# EAGLE board RasPi-P1-HAT-B_v37 (EAGLE 9.7.0)
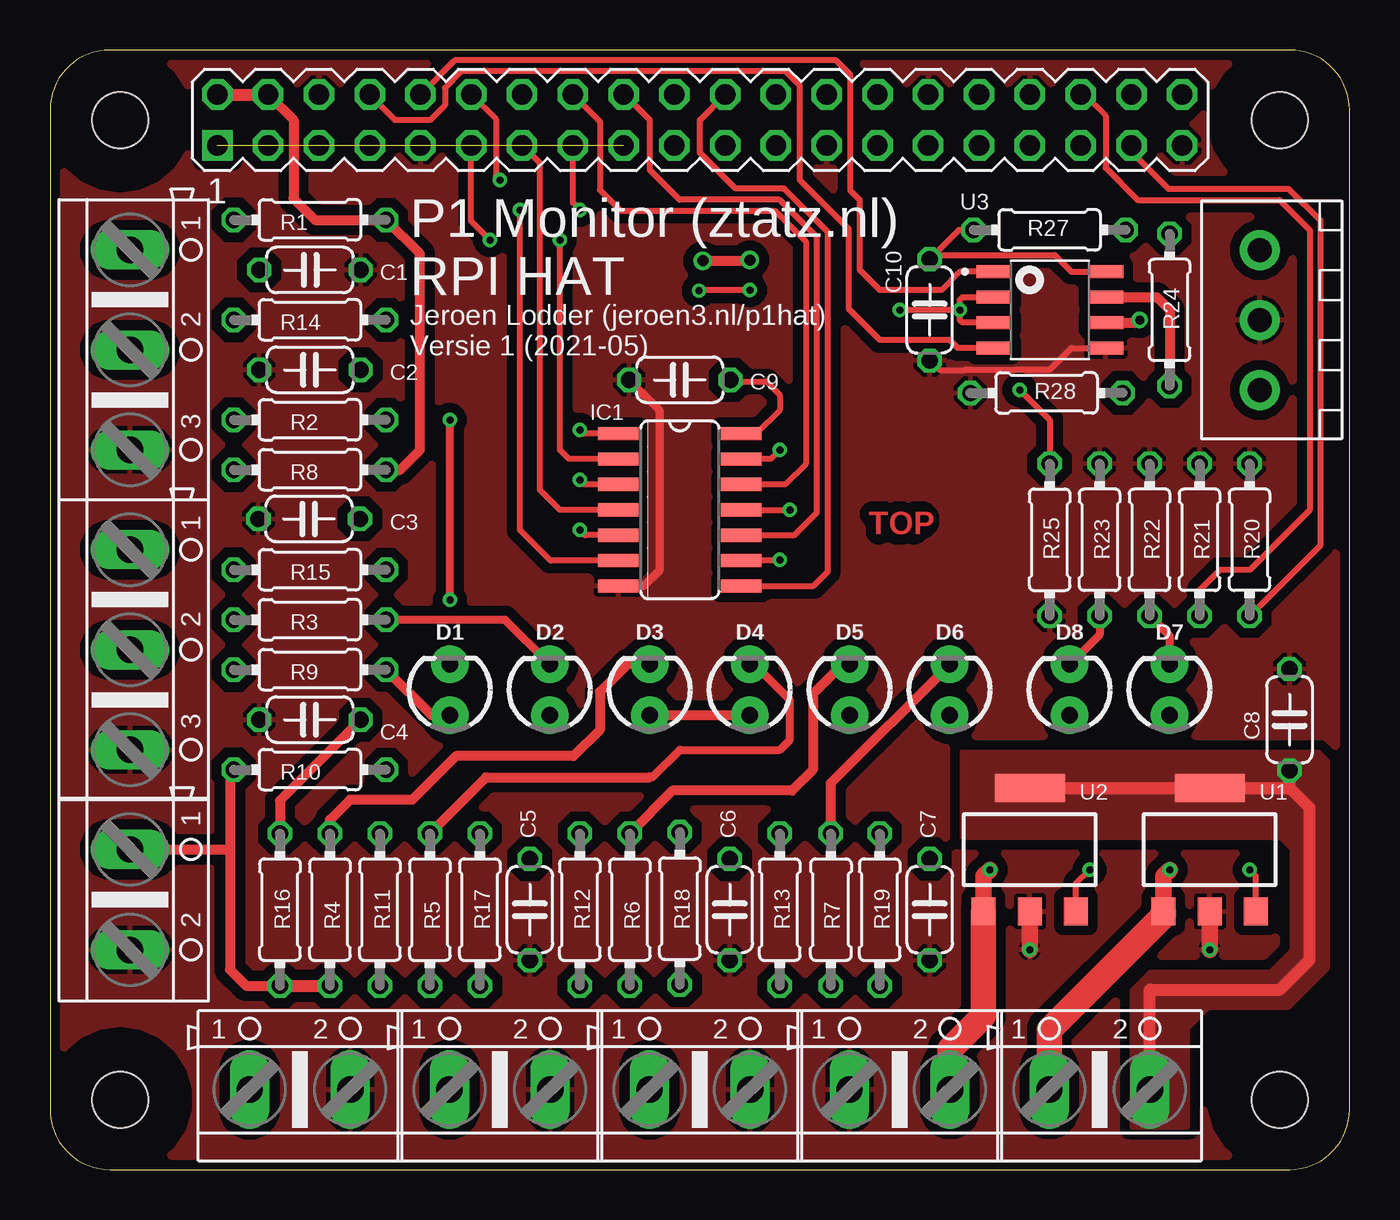
[diagram p0: board, top side]
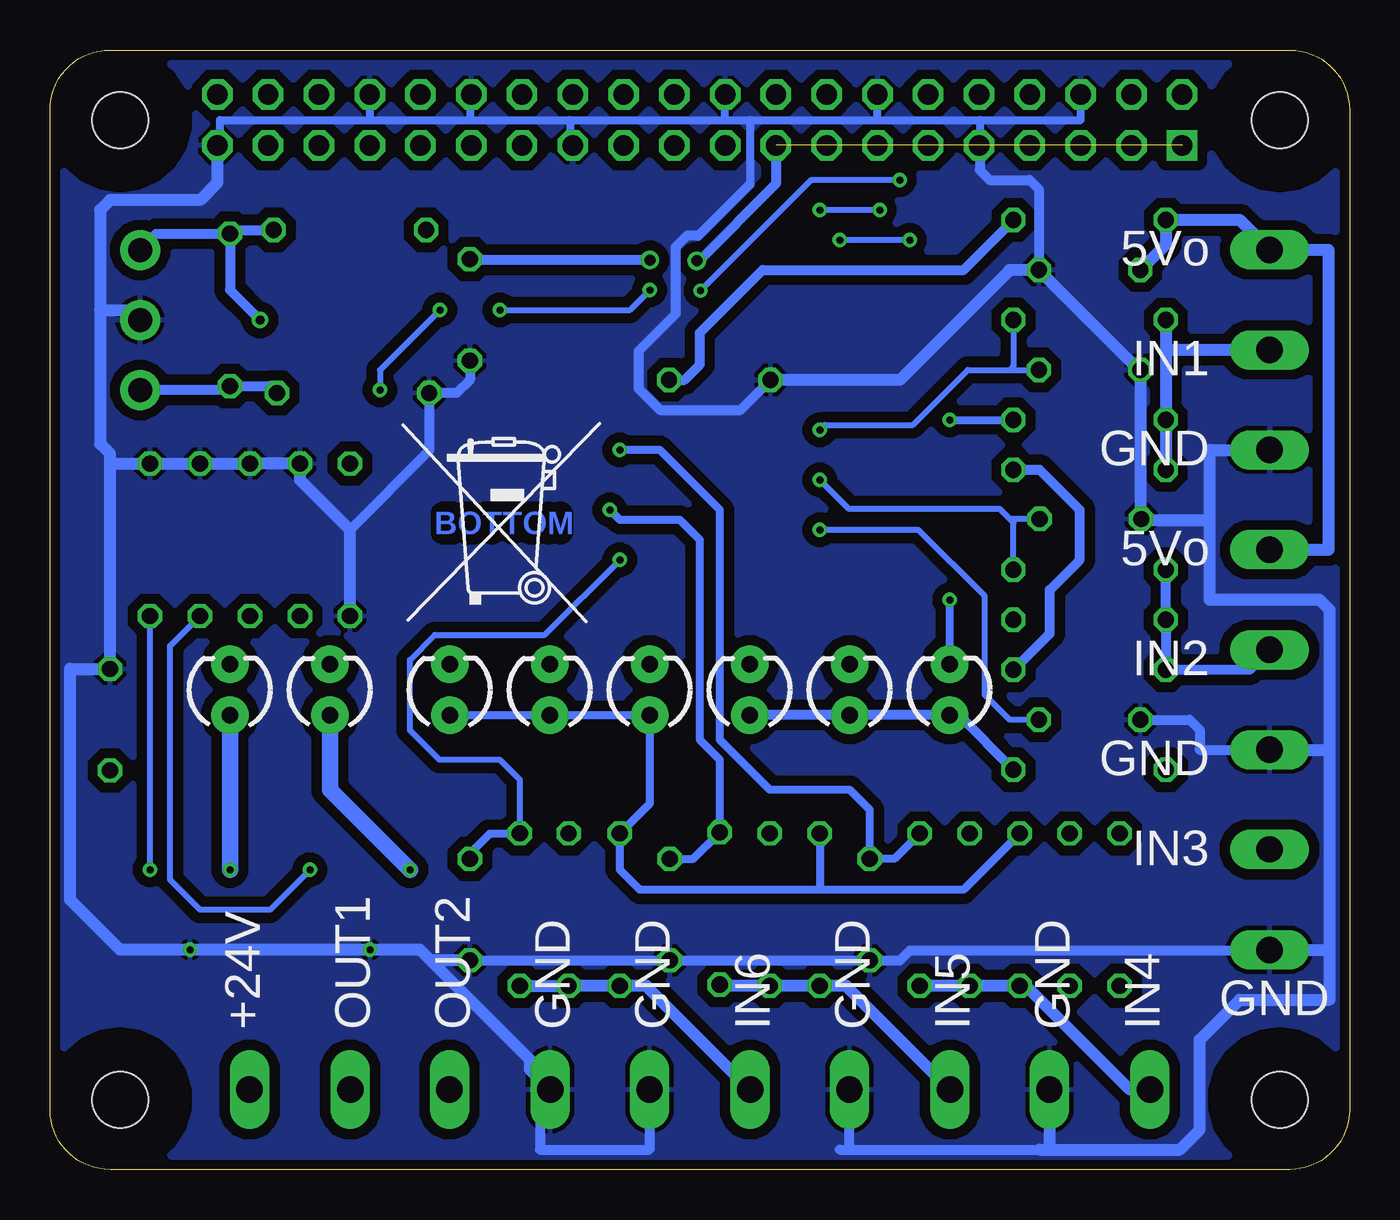
[diagram p1: board, bottom side, seen from below]

Size 65 x 56 mm. Coordinates in mm from the lower left corner, seen from the top.
Outline: 0,3 arc90 3,0 62,0 arc90 65,3 65,53 arc90 62,56 3,56 arc90 0,53 0,3
Copper layers (1*16): Top 0.018mm / dielectric 1.55mm / Bottom 0.018mm
Design rules "eC_2Layer_PClass6_BaseCopperO18_eCDefault_EMRI": minimum track width 0.151mm, minimum drill 0.3mm, track to track 0.15mm, track to pad 0.15mm, pad to pad 0.15mm, via to via 0.15mm, smd to smd 0mil, copper to edge 0.25mm, drill to drill 0.35mm, minimum pad ring 0.175mm, minimum via ring 0.18mm, stop-mask expansion 0mil, vias tented up to drill 0.45mm, thermal gap 0.2mm
Net classes: 0 default: width 0.3 mm, clearance 0.25 mm; 1 normal: width 0.3 mm, clearance 0.25 mm; 2 power: width 0.5 mm, clearance 0.25 mm
Holes 2.8 mm at 3.5,3.5 3.5,52.5 61.5,52.5 61.5,3.5
tRestrict: area 1.9,51 to 5,54; area 60,51 to 63,54; area 60,1.9 to 63,5; area 1.9,1.9 to 5,5
bRestrict: area 1.9,1.9 to 5,5; area 1.9,51 to 5,54; area 60,1.9 to 63,5; area 60,51 to 63,54

## Footprints (pad centres in the part's own frame; a part is rotated, then mirrored left to right if it is on the bottom)
C050-024X044 = drill 0.813 octagon: 1 -2.54,0; 2 2.54,0
LED_3MM = drill 0.813 pad 1.88: A -1.27,0; K 1.27,0
SO14 = smd 0.66 x 2.032: 1 -3.81,-3.073; 2 -2.54,-3.073; 3 -1.27,-3.073; 4 0,-3.073; 5 1.27,-3.073; 6 2.54,-3.073; 7 3.81,-3.073; 8 3.81,3.073; 9 2.54,3.073; 10 1.27,3.073; 11 0,3.073; 12 -1.27,3.073; 13 -2.54,3.073; 14 -3.81,3.073
PIN_20X2 = drill 1.016 square: 1 -24.13,-1.27 | drill 1.016 octagon: 2 -24.13,1.27; 3 -21.59,-1.27; 4 -21.59,1.27; 5 -19.05,-1.27; 6 -19.05,1.27; 7 -16.51,-1.27; 8 -16.51,1.27; 9 -13.97,-1.27; 10 -13.97,1.27; 11 -11.43,-1.27; 12 -11.43,1.27; 13 -8.89,-1.27; 14 -8.89,1.27; 15 -6.35,-1.27; 16 -6.35,1.27; 17 -3.81,-1.27; 18 -3.81,1.27; 19 -1.27,-1.27; 20 -1.27,1.27; 21 1.27,-1.27; 22 1.27,1.27; 23 3.81,-1.27; 24 3.81,1.27; 25 6.35,-1.27; 26 6.35,1.27; 27 8.89,-1.27; 28 8.89,1.27; 29 11.43,-1.27; 30 11.43,1.27; 31 13.97,-1.27; 32 13.97,1.27; 33 16.51,-1.27; 34 16.51,1.27; 35 19.05,-1.27; 36 19.05,1.27; 37 21.59,-1.27; 38 21.59,1.27; 39 24.13,-1.27; 40 24.13,1.27
0204/7 = drill 0.813 octagon: 1 -3.81,0; 2 3.81,0
PG-SOT-223 = smd 1.2 x 1.4: 1 -2.311,-3.099; 2 0,-3.099; 3 2.311,-3.099 | smd 3.5 x 1.4: 4 0,3.099
SOIC-8 = smd 1.75 x 0.65: 1 -2.8,1.905; 2 -2.8,0.635; 3 -2.8,-0.635; 4 -2.8,-1.905; 5 2.8,-1.905; 6 2.8,-0.635; 7 2.8,0.635; 8 2.8,1.905
AK500/3 = drill 1.321 long: 1 -5.004,0; 2 0,0; 3 5.004,0
AK500/2 = drill 1.321 long: 1 -2.515,0; 2 2.515,0
STL1550/3G-3.5-V- = drill 1.2 pad 2: P$1 0,0; P$2 3.5,0; P$3 7,0

## Placement (x,y rotation side)
C1  100nF  [C050-024X044]  13,45 0 top
C2  1nF  [C050-024X044]  13,40 180 top
C3  1nF  [C050-024X044]  12.96,32.54 180 top
C4  1nF  [C050-024X044]  13,22.5 180 top
C5  1nF  [C050-024X044]  24,13 270 top
C6  1nF  [C050-024X044]  34,13 270 top
C7  1nF  [C050-024X044]  44,13 270 top
C8  100nF  [C050-024X044]  62,22.5 90 top
C9  1nF  [C050-024X044]  31.5,39.5 180 top
C10  100nF  [C050-024X044]  44,43 270 top
D1  [LED_3MM]  20,24 90 top
D2  [LED_3MM]  25,24 90 top
D3  [LED_3MM]  30,24 90 top
D4  [LED_3MM]  35,24 90 top
D5  [LED_3MM]  40,24 90 top
D6  [LED_3MM]  45,24 90 top
D7  [LED_3MM]  56,24 90 top
D8  [LED_3MM]  51,24 90 top
IC1  74HC14D  [SO14]  31.5,33 270 top
K1  SSW-120-23-G-D  [PIN_20X2]  32.5,52.5 0 top
R1  10  [0204/7]  13,47.5 180 top
R2  1k  [0204/7]  13,37.5 180 top
R3  1k  [0204/7]  13,27.5 180 top
R4  1k  [0204/7]  14,13 270 top
R5  1k  [0204/7]  19,13 270 top
R6  1k  [0204/7]  29,13 270 top
R7  1k  [0204/7]  39.06,13 270 top
R8  1k  [0204/7]  13,35 180 top
R9  1k  [0204/7]  13,25 180 top
R10  1k  [0204/7]  13,20 180 top
R11  1k  [0204/7]  16.5,13 270 top
R12  1k  [0204/7]  26.5,13 270 top
R13  1k  [0204/7]  36.5,13 270 top
R14  1k  [0204/7]  13,42.5 180 top
R15  1k  [0204/7]  13,30 180 top
R16  1k  [0204/7]  11.5,13 270 top
R17  1k  [0204/7]  21.5,13 270 top
R18  1k  [0204/7]  31.5,13.06 270 top
R19  1k  [0204/7]  41.5,13 270 top
R20  3k9  [0204/7]  60,31.5 90 top
R21  3k9  [0204/7]  57.5,31.5 90 top
R22  3k9  [0204/7]  55,31.5 90 top
R23  3k9  [0204/7]  52.5,31.5 90 top
R24  Rt  [0204/7]  56,43 90 top
R25  3k9  [0204/7]  50,31.5 270 top
R27  1k  [0204/7]  50,47 180 top
R28  1k  [0204/7]  49.84,38.84 180 top
U1  BTS4141N  [PG-SOT-223]  58,16 0 top
U2  BTS4141N  [PG-SOT-223]  49,16 0 top
U3  ST3485EBDR  [SOIC-8]  50,43 0 top
U$3  [MUELLTONNE_10.00]  48,27 0 bottom
X1  AK500/3  [AK500/3]  4,41 270 top
X2  AK500/3  [AK500/3]  4,26 270 top
X3  AK500/2  [AK500/2]  4,13.5 270 top
X4  AK500/2  [AK500/2]  12.5,4 0 top
X5  AK500/2  [AK500/2]  22.5,4 0 top
X6  AK500/2  [AK500/2]  32.5,4 0 top
X7  AK500/2  [AK500/2]  52.5,4 0 top
X8  AK500/2  [AK500/2]  42.5,4 0 top
X9  STL1550/3G-3.5-V-GREEN  [STL1550/3G-3.5-V-]  60.5,39 90 top

## Library data of the parts
C1-C10 = Library; DIELECTRIC: X7R; SPICEPREFIX: C
D1-D8 = Library; PROD_ID: DIO-08794
IC1 = 74xx-eu
K1 U1-U3 X9 = Library
R1-R25 R27 R28 = rcl; SPICEPREFIX: R; TOLERANCE: 5%
U$3 = logo
X1-X8 = Library; OC_FARNELL: unknown; OC_NEWARK: unknown

## Nets
+3V3: C10.1 K1.1 K1.17 R27.2 U3.8
+5V: C9.1 D1.A D2.A D3.A D4.A D5.A D6.A IC1.14 K1.2 K1.4 R1.1 R8.1 R9.1 R10.1 R11.1 R12.1 R13.1
+24V: C8.1 U1.4 U2.4 X7.2
A [normal]: R24.2 R27.1 U3.6 X9.P$3
B [normal]: R24.1 R28.1 U3.7 X9.P$1
GND: C1.2 C2.2 C3.2 C4.2 C5.2 C6.2 C7.2 C8.2 C9.2 C10.2 IC1.7 K1.6 K1.9 K1.14 K1.20 K1.25 K1.30 K1.34 K1.39 R20.2 R21.2 R22.2 R23.2 R25.2 R28.2 U1.2 U2.2 U3.5 X1.3 X2.3 X3.2 X4.2 X5.2 X6.2 X8.1 X9.P$2
GPIO0_ID_SDA: K1.27
GPIO1_ID_SCL: K1.28
GPIO4_GPCLK0: K1.7
GPIO5: K1.29
GPIO6: K1.31
GPIO7_CE1: K1.26
GPIO8_CE0: K1.24
GPIO9_MISO: K1.21
GPIO10_MOSI: K1.19
GPIO11_SCLK: K1.23
GPIO12_PWM0: K1.32
GPIO13_PWM1: K1.33
GPIO14_TXD: K1.8 U3.4
GPIO15_RXD: K1.10 U3.1
GPIO16_OUT2: K1.36 R21.1 U2.3
GPIO17_WATER1: IC1.2 K1.11
GPIO18_PCM_CLK: K1.12 R25.1 U3.2 U3.3
GPIO19_PCM_FS: K1.35
GPIO20_PCM_DIN: K1.38
GPIO21_PCM_DOUT: K1.40
GPIO22_PULS1: IC1.6 K1.15
GPIO23_PULS2: IC1.12 K1.16
GPIO24_PULS3: IC1.10 K1.18
GPIO25_PULS4: IC1.8 K1.22
GPIO26_OUT1: K1.37 R20.1 U1.3
GPIO27_WATER2: IC1.4 K1.13
I2C_SCL: K1.5
I2C_SDA: K1.3
IN1: R2.2 R8.2 R14.2 X1.2
IN1_1: C2.1 IC1.1 R14.1
IN2: R3.2 R9.2 R15.2 X2.2
IN2_1: C3.1 IC1.3 R15.1
IN3: R4.2 R10.2 R16.2 X3.1
IN3_1: C4.1 IC1.5 R16.1
IN4: R5.2 R11.2 R17.2 X4.1
IN5: R6.2 R12.2 R18.2 X5.1
IN6: R7.2 R13.2 R19.2 X6.1
N$1: D6.K R7.1
N$2: D5.K R6.1
N$3: D4.K R5.1
N$4: D7.K R22.1
N$5: D8.K R23.1
N$6: D3.K R4.1
N$7: D2.K R3.1
N$8: D1.K R2.1
N$13: C5.1 IC1.13 R17.1
N$15: C6.1 IC1.11 R18.1
N$17: C7.1 IC1.9 R19.1
N$19: C1.1 R1.2 X1.1 X2.1
OUT1: D7.A U1.1 X7.1
OUT2: D8.A U2.1 X8.2

## Tracks (layer width: path | path; a pad name or v marks a point on that pad's centre or on a via)
+3V3  (via drill 0.55)  (1 unrouted)
  Top 0.3: C10.1 44.29,45.54 44.5,45.75 50.25,45.75 51.09,44.91 U3.8
  Top 0.305: C10.1 45.46,47 R27.2
  Top 0.508: v32.65,45.45 34.95,45.45 v35,45.5
  Bottom 0.508: K1.17 28.69,49.31 32.6,45.4 v32.65,45.45 | v35,45.5 43.96,45.5 C10.1
+5V
  Top 0.305: IC1.14 35.31,36.81 36.5,38 36.5,38.75 35.83,39.42 34,39.42 34,39.5 C9.1
  Top 0.508: R8.1 17.5,35 18.5,36 18.5,45.81 R1.1 13.25,47.5 12.18,48.57 12.18,52.5 K1.4 | R9.1 19.08,22.73 D1.A | D3.A D4.A
  Top 0.61: K1.2 K1.4
  Bottom 0.406: D6.A D5.A D4.A 35,18.31 R13.1 36.5,15 35.5,14 26.5,14 | R12.1 26.5,14 | R11.1 19.31,14 26.5,14
  Bottom 0.508: R1.1 19.31,45 29.35,45 32.5,41.85 32.5,40.27 33.27,39.5 C9.1 | R9.1 15,26.81 15,29 13.5,30.5 13.5,33 15.5,35 R8.1 | D3.A D2.A D1.A 19.54,22.73 R10.1
+24V
  Top 0.61: U2.4 U1.4 62,19.1 | 62,19.1 62,20 | X7.2 55.02,9 61.5,9 63,10.5 63,18.1 62,19.1
  Top 0.813: 62,20 C8.1
  pour Top (isolate 0.254, no thermals): 54,2 54,9 55,10 61,10 62,11 62,16 61.5,16.5 45.5,16.5 45.5,21 63.5,21 64,20.5 64,10 62,8 58,8 57,7 57,2
A  (via drill 0.45)
  Top 0.508: U3.6 54.37,42.37 v54.5,42.5
  Bottom 0.3: 59.69,46.81 59.5,46.81
  Bottom 0.508: X9.P$3 59.69,46.81 | 59.5,46.81 R24.2 | R27.1 55.81,47 R24.2 | R24.2 56,44 v54.5,42.5
B
  Top 0.508: U3.7 55.37,43.63 56,43 R24.1
  Bottom 0.508: R28.1 54,39.19 R24.1 56.19,39 X9.P$1
GND  (via drill 0.35)
  Top 0.3: C10.2 44.04,40.46 44.5,40 45.76,40 45.77,40.01 50.01,40.01 51.09,41.09 U3.5
  Top 0.406: IC1.7 29.69,29.19 30.5,30 30.5,37.96 C9.2
  Top 0.813: v49,11 U2.2 | U1.2 v58,11
  Bottom 0.406: 56.5,51.23 56.5,52.5 49.01,52.5 | 49.01,52.5 44,52.5 | 44,52.5 39,52.5 | 39,52.5 31.23,52.5 | 31.23,52.5 30,52.5 | 30,52.5 23.61,52.5 | 23.61,52.5 18.5,52.5 | 18.5,52.5 13.45,52.5 K1.6 | 18.5,52.5 18.5,51.23 | 23.61,52.5 K1.14 | 31.23,52.5 K1.20 | 39,52.5 39,51.23 | 44,53.77 44,52.5 | K1.34 49.01,52.5 | 30,52.5 30,49.28
  Bottom 0.508: 25.5,1 25.02,1 | 25.02,1 15.5,1 | 25.02,1 X5.2 | X8.1 40.5,3.48 40.5,1 35.02,1 X6.2 | C9.2 30.46,38 34.5,38 35.55,39.05 35.55,40.95 33.71,42.79 33.71,46.15 33.15,46.71 32.57,46.71 30,49.28 | C7.2 C6.2 C5.2 22.5,10.46 22,10.96 4.03,10.96 X3.2 | C4.2 8,22.5 7.5,22 7.5,21 X2.3 | K1.9 18.57,51.19 18.5,51 18.5,50 18,49.5 16,49.5 15.54,49.04 C1.2 | C10.2 44,39.5 44.66,38.84 R28.2 46.03,35.97 50,32
  Bottom 0.61: 62,35.31 C8.2 64,25.04 64,13.5 61.5,11 v58,11 v49,11 46.5,11 46,10.5 | 62,35.31 62,35.81 62.5,36.31 62.5,43 | 62,35.31 R20.2 | R20.2 R22.2 R23.2 52.5,34.5 50,32 R25.2 | 56.5,51.23 K1.39 56.63,49.37 57.5,48.5 62,48.5 62.5,48 62.5,43 | 18.5,51.23 K1.9 | 39,51.23 K1.25 | K1.30 44,53.77 | R20.2 R21.2 | 46,10.5 44.04,10.5 C7.2 | X8.1 41,5.01 41,5.5 46,10.5 | 1,11 1,21 | 1,21 1,28 1.5,28.5 7,28.5 7,32.5 | 15.5,1 15.02,1 | 15.02,1 8.5,1 7.5,2 7.5,6.5 5.5,8.5 1,8.5 1,11 | X1.3 4.5,36 7,36 7,32.5 | X4.2 15.02,1 | X3.2 1.01,10.98 1,11 | X2.3 1,21 | 7,32.5 10.37,32.5 C3.2 10.46,32.59 C2.2 10.54,40 C1.2 17,45 22.5,39.5 C9.2 | 62.5,43 61,43 X9.P$2
  pour Bottom (isolate 0.5, rank 6): 62.45,-0.1 62.88,0 63.3,0.16 63.69,0.37 64.05,0.64 64.36,0.95 64.63,1.31 64.84,1.7 65,2.12 65.1,2.55 65.13,3 65.13,53 65.1,53.45 65,53.88 64.84,54.3 64.63,54.69 64.36,55.05 64.05,55.36 63.69,55.63 63.3,55.84 62.88,56 62.45,56.1 62,56.13 3,56.13 2.55,56.1 2.12,56 1.7,55.84 1.31,55.63 0.95,55.36 0.64,55.05 0.37,54.69 0.16,54.3 0,53.88 -0.1,53.45 -0.13,53 -0.13,37.49 -0.11,37.3 -0.11,18.7 -0.13,18.51 -0.13,3 -0.1,2.55 0,2.12 0.16,1.7 0.37,1.31 0.64,0.95 0.95,0.64 1.31,0.37 1.7,0.16 2.12,0 2.55,-0.1 3,-0.13 62,-0.13
  pour Top (isolate 0.5, rank 6): 62.45,-0.1 62.88,0 63.3,0.16 63.69,0.37 64.05,0.64 64.36,0.95 64.63,1.31 64.84,1.7 65,2.12 65.1,2.55 65.13,3 65.13,53 65.1,53.45 65,53.88 64.84,54.3 64.63,54.69 64.36,55.05 64.05,55.36 63.69,55.63 63.3,55.84 62.88,56 62.45,56.1 62,56.13 3,56.13 2.55,56.1 2.12,56 1.7,55.84 1.31,55.63 0.95,55.36 0.64,55.05 0.37,54.69 0.16,54.3 0,53.88 -0.1,53.45 -0.13,53 -0.13,3 0.47,0.96 2.06,-0.63 49.53,-1.02
GPIO14_TXD
  Top 0.3: K1.8 17.26,52.5 19,52.5 19.75,53.25 19.75,54.09 20.59,54.93 36.79,54.93 37.5,54.22 37.5,49.5 39.95,47.05 39.95,43.05 41.5,41.5 45,41.5 45.41,41.09 U3.4
GPIO15_RXD
  Top 0.3: U3.1 45.51,44.91 44.6,44 41.5,44 40.5,45 40.5,48.5 40.03,48.97 40.03,54.77 39.32,55.48 20.24,55.48 K1.10
GPIO16_OUT2  (via drill 0.35)
  Top 0.3: K1.36 51.73,53.77 52.8,52.7 52.8,50.1 54.4,48.5 61.5,48.5 63,47 63,33 60,30 58.5,30 57.5,29 R21.1
  Top 0.305: U2.3 51.31,14.31 v52,15
  Bottom 0.305: v52,15 54,13 57.5,13 59,14.5 59,26.19 R21.1
GPIO17_WATER1  (via drill 0.35)
  Top 0.305: IC1.2 25.96,35.54 25.5,36 v25.5,46.5 | v22,46.5 21.07,47.43 K1.11
  Bottom 0.305: v22,46.5 v25.5,46.5
GPIO18_PCM_CLK  (via drill 0.35)
  Top 0.3: K1.12 22.3,52.54 22.3,49.7 v22.5,49.5 | v35,44 32.5,44 v32.46,43.96 | v45.5,43 v42.5,43
  Top 0.305: U3.3 45.63,42.37 45.5,42.5 v45.5,43 45.5,43.5 45.63,43.63 U3.2 | v48.5,39 50,37.5 R25.1
  Bottom 0.3: v42.5,43 36,43 v35,44 | v22.5,49.5 26.93,49.5 v32.46,43.96
  Bottom 0.305: v48.5,39 48.5,40 v45.5,43
GPIO22_PULS1  (via drill 0.35)
  Top 0.305: IC1.6 25.04,30.46 23.5,32 v23.5,48 | v26.5,48 26.15,48.35 K1.15
  Bottom 0.305: v23.5,48 v26.5,48
GPIO23_PULS2
  Top 0.305: K1.16 27.5,52.42 27.5,49 28.54,47.96 36.26,47.96 37.8,46.42 37.8,35.3 36.77,34.27 IC1.12
GPIO24_PULS3
  Top 0.305: IC1.10 37.23,31.73 38.35,32.85 38.35,46.65 36.49,48.51 31.49,48.51 30,50 30,52.5 28.73,53.77 K1.18
GPIO25_PULS4
  Top 0.305: IC1.8 38.19,29.19 38.91,29.91 38.91,46.88 36.72,49.07 34.29,49.07 32.5,50.85 32.5,52.5 K1.22
GPIO26_OUT1  (via drill 0.35)
  Top 0.3: 54.09,50.91 55.95,49.05 61.95,49.05 63.55,47.45 63.55,31.24 R20.1
  Top 0.305: 54.09,50.91 K1.37 | U1.3 60.31,14.69 v60,15
  Bottom 0.305: v60,15 R20.1
GPIO27_WATER2
  Top 0.305: IC1.4 25.5,33 24.5,34 24.5,50.34 K1.13
IN1
  Bottom 0.61: R14.2 9.19,41 | 9.19,41 R2.2 R8.2 | X1.2 9.19,41
IN1_1  (via drill 0.35)
  Top 0.305: IC1.1 26.69,36.81 v26.5,37
  Bottom 0.3: 19.1,40 21.85,37.25 26.25,37.25 v26.5,37 | R14.1 16.81,40.19 17,40
  Bottom 0.305: 19.1,40 17,40 C2.1
IN2
  Bottom 0.508: R15.2 R3.2 R9.2 5,25 X2.2
IN2_1  (via drill 0.35)
  Top 0.305: IC1.3 26.73,34.27 v26.5,34.5
  Bottom 0.305: C3.1 17,32.54 | v26.5,34.5 25.04,33.04 17.5,33.04 17,32.54 | R15.1 16.81,32.35 17,32.54
IN3
  Top 0.508: X3.1 8.98,16.02 9,16 | 9,16 9,10 9.81,9.19 R16.2 | R10.2 9,19.81 9,16
  Top 0.61: R16.2 R4.2
IN3_1  (via drill 0.35)
  Top 0.305: IC1.5 26.77,31.73 v26.5,32
  Top 0.508: C4.1 11.5,18.46 R16.1
  Bottom 0.305: C4.1 17,22.5 18.25,23.75 18.25,28.68 21.57,32 v26.5,32
IN4
  Bottom 0.61: R17.2 R5.2 R11.2 16.18,9.19 10.98,4 X4.1
IN5
  Bottom 0.61: R18.2 31.44,9.19 R6.2 R12.2 25.18,9.19 X5.1
IN6
  Bottom 0.61: R19.2 R7.2 R13.2 35.17,9.19 X6.1
N$1
  Top 0.508: R7.1 39.06,19.33 D6.K
N$2
  Top 0.508: R6.1 31.15,18.96 37.12,18.96 38.16,20 38.16,23.79 39.64,25.27 D5.K
N$3
  Top 0.406: 29.99,19.62 30.12,19.62 31.5,21 36.5,21 37,21.5 37,23.5 35,25.5
  Top 0.508: R5.1 21.81,19.62 29.99,19.62 | 35,25.5 D4.K
N$4
  Top 0.406: R22.1 56,26.69 D7.K
N$5
  Top 0.406: R23.1 52.5,26.77 D8.K
N$6
  Top 0.508: R4.1 14,17.5 15,18.5 18.11,18.5 20.3,20.69 26.19,20.69 27.5,22 27.5,23.9 28.9,25.3 D3.K
N$7
  Top 0.406: D2.K 22.77,27.5 R3.1
N$8  (via drill 0.35)
  Top 0.406: v20,28.5 v20,37.5
  Bottom 0.406: D1.K v20,28.5 | v20,37.5 R2.1
N$13  (via drill 0.35)
  Top 0.305: IC1.13 36.04,35.54 v36.5,36
  Bottom 0.406: R17.1 22.77,15.54 C5.1 24,18 25,19 29,19 31.5,21.5 31.5,33 34.5,36 v36.5,36
N$15  (via drill 0.35)
  Top 0.305: IC1.11 v37,33
  Bottom 0.406: C6.1 32.83,15.54 R18.1 31.5,20.5 32.5,21.5 32.5,31.5 33,32 33.5,32.5 36.5,32.5 v37,33
N$17  (via drill 0.35)
  Top 0.305: IC1.9 36.46,30.46 v36.5,30.5
  Bottom 0.305: v36.5,30.5 40.26,26.74 45.76,26.74 47,25.5 47,21.97 45.52,20.49 42.49,20.49 41.5,19.5 R19.1
  Bottom 0.406: R19.1 43,16.81 44,15.81 C7.1
N$19
  Bottom 0.61: X2.1 1.05,31 1.05,46 1.06,46 X1.1 5.5,47.5 R1.2 9.19,46.27 C1.1
OUT1  (via drill 0.35)
  Top 0.813: U1.1 55.69,14.69 v56,15
  Top 1.27: U1.1 55.69,12.69 49.98,6.99 X7.1
  Bottom 0.813: v56,15 D7.A
OUT2  (via drill 0.35)
  Top 0.813: U2.1 46.69,14.69 v47,15
  Top 1.27: U2.1 46.69,7.69 45.02,6.01 X8.2
  Bottom 0.813: v47,15 51,19 D8.A

## Text on the board
Top: TOP
Bottom: BOTTOM
tPlace: P1 Monitor (ztatz.nl) / RPI HAT | Jeroen Lodder (jeroen3.nl/p1hat) / Versie 1 (2021-05)
bPlace: 5Vo | IN1 | GND | 5Vo | IN2 | GND | IN3 | GND | IN4 | GND | IN5 | GND | IN6 | GND | GND | OUT2 | OUT1 | +24V
tDocu: 5Vout | A | IN1 | RS-485 | B | GND | 5Vout | IN2 | GND | IN3 | GND | OUT2 | OUT1 | 24Vin | IN4 | GND | IN5 | GND | IN6 | GND | GND